# Altium PCB AX301_AX4010.PcbDoc (part 4 of 10)
Units mil, origin at the board's own origin, x right, y up, seen from the top; angles counter-clockwise.
Board outline 5185 x 3614 mil, 4 copper layers (Top Layer, GND, Mid-Layer 1, Bottom Layer); 191 components, 338 nets, 1108 pads, 420 vias.
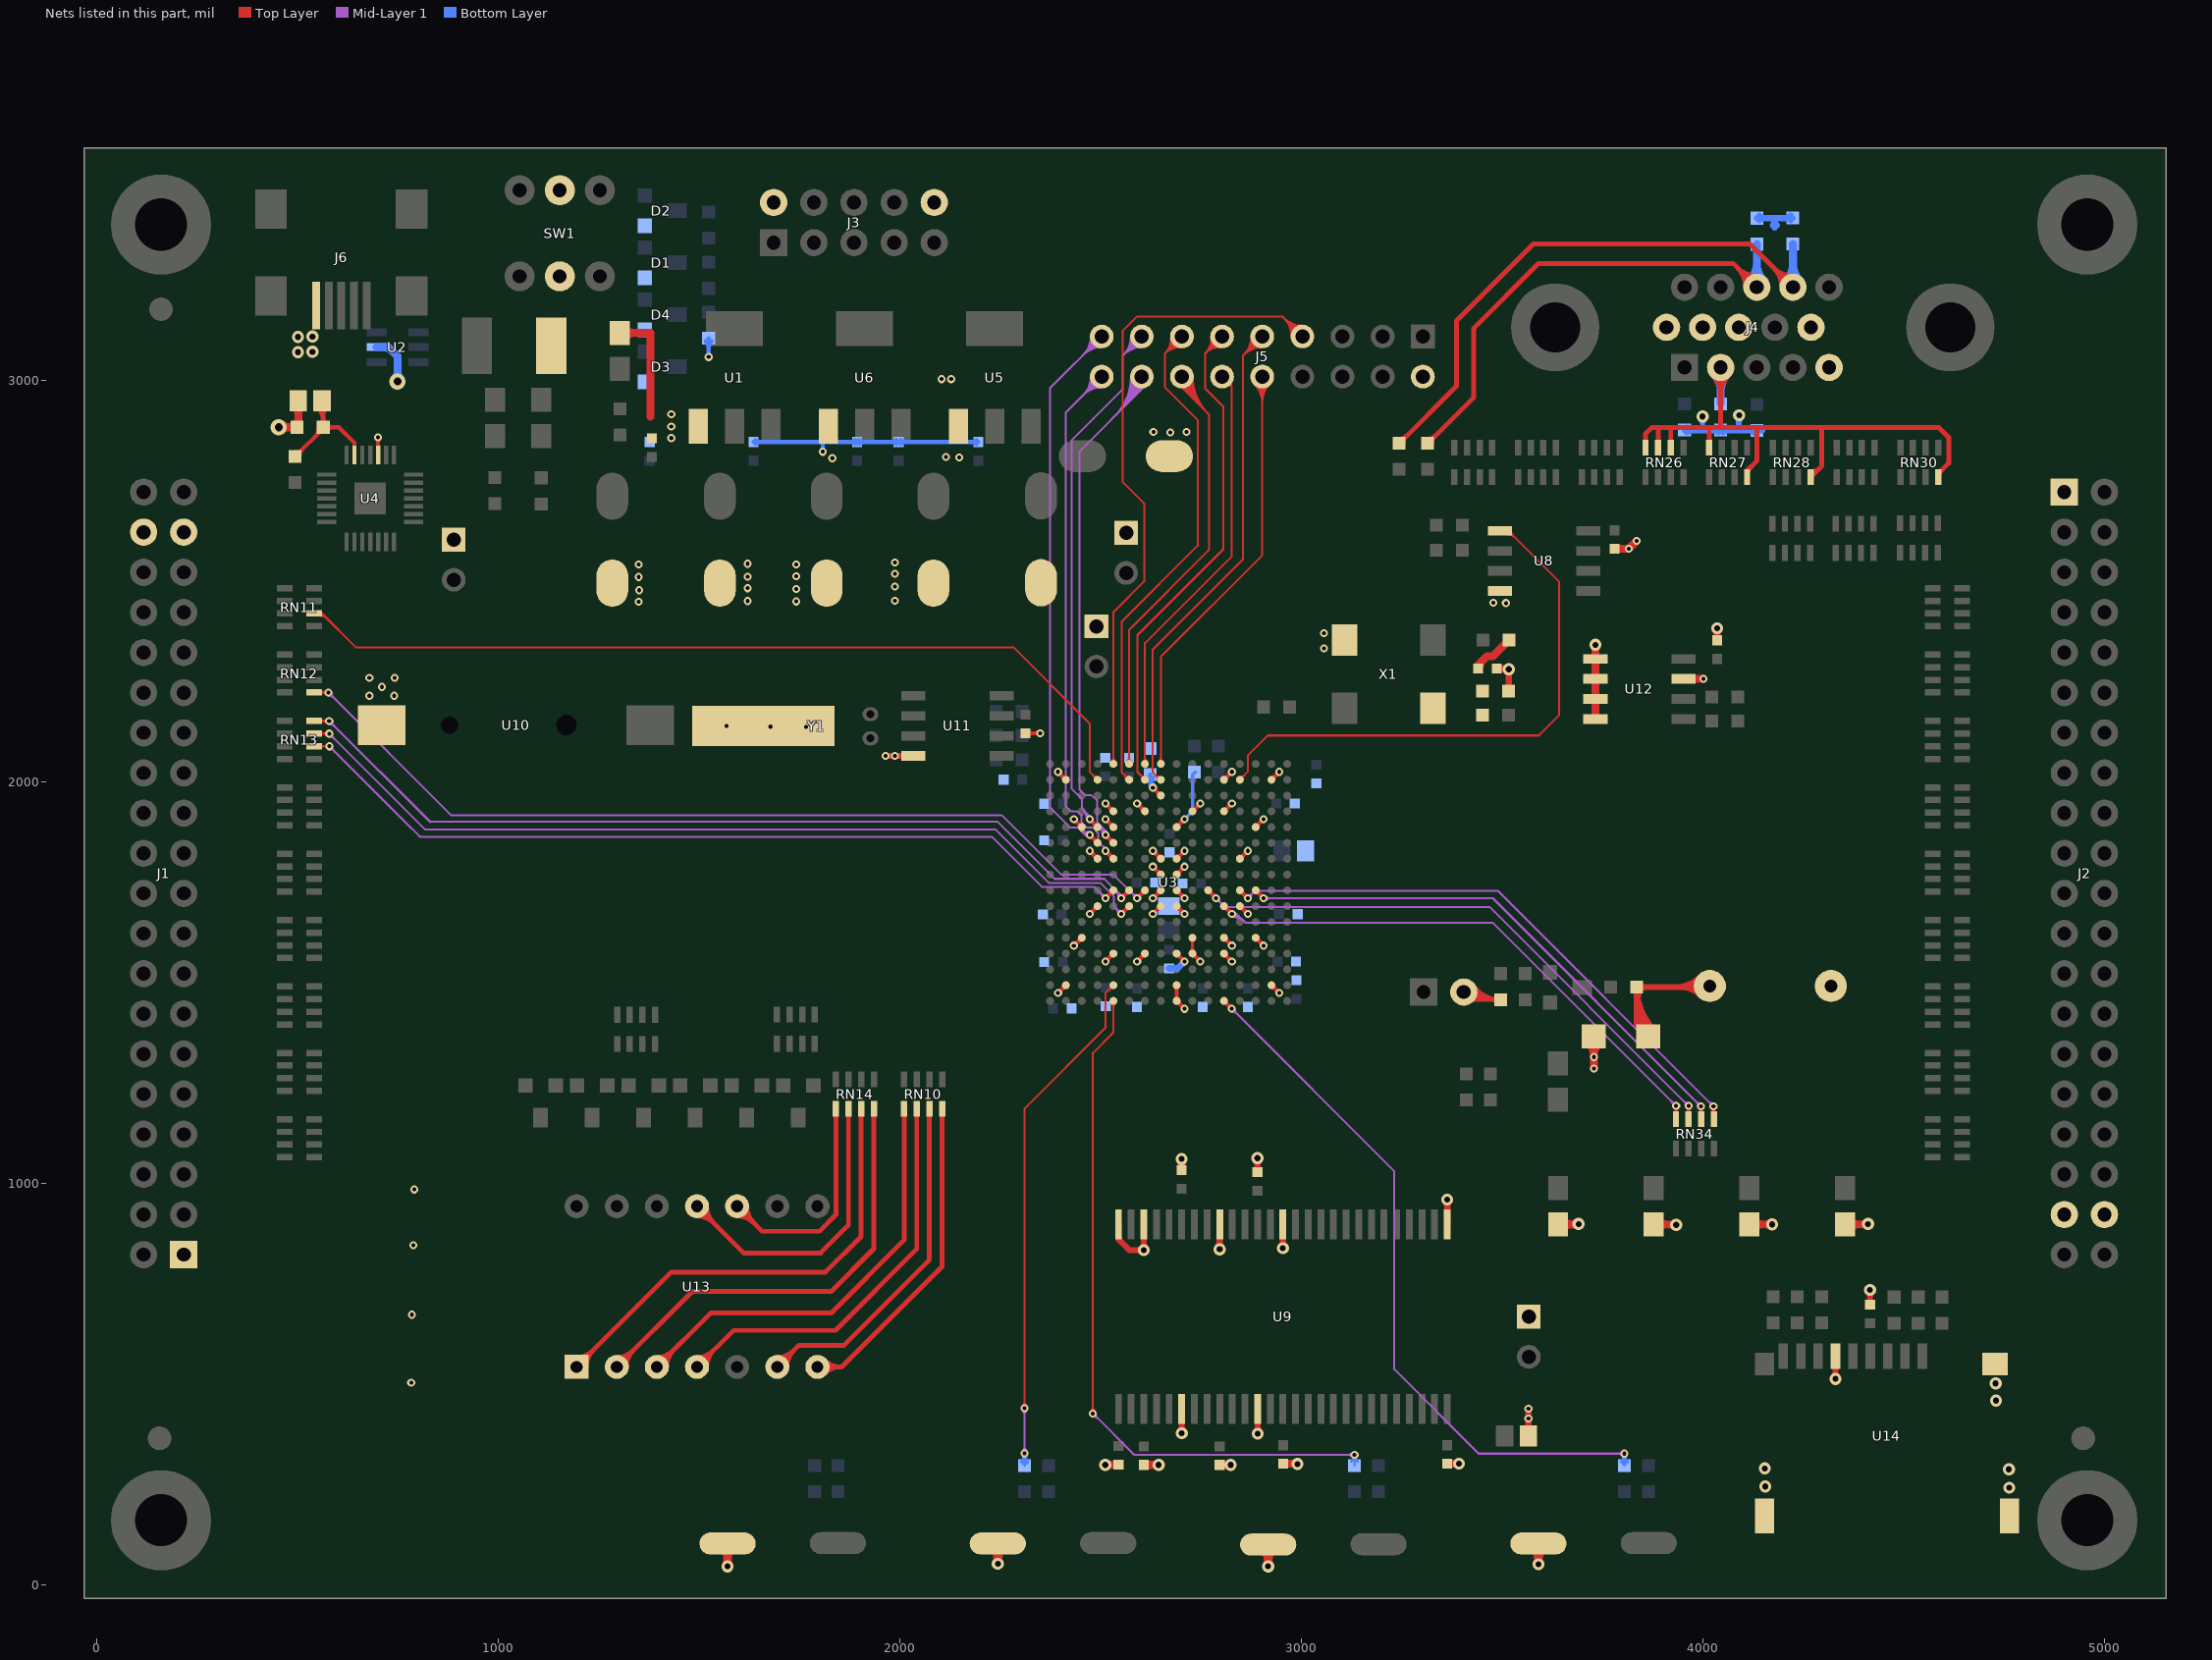
[diagram p6: the nets of this part, all layers, seen from the top]

## Via types
v1: diameter 20, hole 10, Top Layer to Bottom Layer, 377 vias
v2: diameter 30, hole 15, Top Layer to Bottom Layer, 41 vias
v3: diameter 40, hole 20, Top Layer to Bottom Layer, 2 vias

## Nets (pads, with @x,y where several pads share a name; then routed paths per layer and width w, separated by ;. In a path a pad name is that pad's centre, name@x,y a point inside that pad or via, vN(x,y) a via of type N, cw(c..) or ccw(c..) an arc to the next point about the centre after c; other vN are vias at no path point) (continued)
GND: C1.2 C2.2 C3.2 C4.2 C5.2 C6.2 C7.2 C8.2 C9.2 C10.2 C11.2 C12.2 C13.2 C14.2 C15.2 C16.2 C17.2 C18.2 C19.2 C20.2 C21.2 C22.2 C23.2 C24.1 C25.2 C26.2 C27.2 C28.2 C29.2 C30.2 C31.2 C32.2 C33.2 C34.2 C35.2 C36.2 C37.2 C38.2 C39.2 C40.2 C41.2 C42.2 C43.2 C44.2 C45.2 C46.2 C47.2 C48.2 C49.2 C50.2 D1.1 D2.1 D3.1 D4.1 D5.1 EC1.2 EC2.2 EC3.2 EC4.2 EC5.2 EC6.2 J1.1 J1.37 J1.38 J2.1 J2.37 J2.38 J3.2 J3.10 J4.5 J4.6 J4.7 J4.8 J4.10 J5.2 J6.5 K1.2 K2.2 K3.1 K4.2 LED0.2 LED1.2 LED2.2 LED3.2 LED6.2 LS1.2 P1.1 P2.1 P3.1 P4.1 R6.1 R12.2 U1.1 U2.2 U3.B2 U3.B15 U3.C5 U3.C12 U3.D7 U3.D10 U3.E2 U3.E4 U3.E12 U3.E13 U3.G4 U3.G12 U3.G13 U3.H7 U3.H8 U3.H9 U3.H10 U3.H13 U3.H15 U3.H16 U3.J7 U3.J8 U3.J9 U3.J10 U3.K4 U3.K13 U3.M4 U3.M5 U3.M13 U3.N7 U3.N10 U3.P5 U3.P12 U3.R2 U3.R15 U4.3 U5.1 U6.1 U8.4 U9.6 U9.12 U9.28 U9.41 U9.46 U9.52 U9.54 U10.2 U11.4 U12.1 U12.2 U12.3 U12.4 U12.7 U14.6 U14.11 U14.12 U14.13 X1.2 Y1.0 | length 8392.1
  Top Layer w8: U3.G13@2724.92,1575.97 ccw(c2714.95,1585.94) 2729.06,1585.94 ccw(c2743.16,1585.94) U3.G13@2733.19,1575.97 ; U3.G12@2724.92,1607.07 cw(c2714.95,1597.1) 2729.06,1597.1 cw(c2743.16,1597.1) U3.G12@2733.19,1607.07 ; U3.G13@2729.06,1571.83 U3.G12@2729.06,1611.2
  Top Layer w10: v1@697.09,2854.09 cw(c688.56,2845.56) 700.63,2845.56 cw(c712.7,2845.56) v1@704.17,2854.09 ; U4.3@700.63,2814 v1(700.63,2857.63) ; C36.2@2313,2120.76 v1(2349.76,2120.76) ; C36.2@2318.3,2115.45 cw(c2331.11,2102.65) 2331.11,2120.76 cw(c2331.11,2138.86) C36.2@2318.3,2126.06 ; v1@2346.22,2117.22 ccw(c2337.68,2108.68) 2337.68,2120.76 ccw(c2337.68,2132.83) v1@2346.22,2124.29 ; v1(2394.41,1473.41) U3.R15@2414.09,1493.09 ; v1@2394.41,1478.41 ccw(c2394.41,1490.48) 2402.94,1481.94 ccw(c2411.48,1473.41) v1@2399.41,1473.41 ; v1@2394.41,2019.59 cw(c2394.41,2007.52) 2402.94,2016.06 cw(c2411.48,2024.59) v1@2399.41,2024.59 ; v1(2394.41,2024.59) U3.R2@2414.09,2004.91 ; U3.R15@2409.25,1493.09 cw(c2397.56,1493.09) 2405.83,1484.83 cw(c2414.09,1476.56) U3.R15@2414.09,1488.25 ; U3.R2@2409.25,2004.91 ccw(c2397.56,2004.91) 2405.83,2013.17 ccw(c2414.09,2021.44) U3.R2@2414.09,2009.75 ; v1(2433.78,1591.52) U3.P12@2453.46,1611.2 ; v1@2433.78,1596.52 ccw(c2433.78,1608.59) 2442.31,1600.05 ccw(c2450.85,1591.52) v1@2438.78,1591.52 ; v1@2433.78,1901.48 cw(c2433.78,1889.41) 2442.31,1897.95 cw(c2450.85,1906.48) v1@2438.78,1906.48 ; v1(2433.78,1906.48) U3.P5@2453.46,1886.8 ; U3.P12@2448.62,1611.2 cw(c2436.93,1611.2) 2445.2,1602.94 cw(c2453.46,1594.67) U3.P12@2453.46,1606.36 ; U3.P5@2448.62,1886.8 ccw(c2436.93,1886.8) 2445.2,1895.06 ccw(c2453.46,1903.33) U3.P5@2453.46,1891.64 ; v1(2473.15,1670.26) U3.N10@2492.83,1689.94 ; v1@2473.15,1675.26 ccw(c2473.15,1687.33) 2481.68,1678.79 ccw(c2490.22,1670.26) v1@2478.15,1670.26 ; v1@2473.15,1822.74 cw(c2473.15,1810.67) 2481.68,1819.21 cw(c2490.22,1827.74) v1@2478.15,1827.74 ; v1(2473.15,1827.74) U3.N7@2492.83,1808.06 ; U3.N10@2487.99,1689.94 cw(c2476.3,1689.94) 2484.57,1681.68 cw(c2492.83,1673.41) U3.N10@2492.83,1685.1 ; U3.N7@2487.99,1808.06 ccw(c2476.3,1808.06) 2484.57,1816.32 ccw(c2492.83,1824.59) U3.N7@2492.83,1812.9 ; v1(2512.52,1552.15) U3.M13@2532.2,1571.83 ; v1@2512.52,1557.15 ccw(c2512.52,1569.22) 2521.05,1560.68 ccw(c2529.59,1552.15) v1@2517.52,1552.15 ; v1@2512.52,1901.48 cw(c2512.52,1889.41) 2521.05,1897.95 cw(c2529.59,1906.48) v1@2517.52,1906.48 ; v1(2512.52,1906.48) U3.M5@2532.2,1886.8 ; v1@2512.52,1940.85 cw(c2512.52,1928.78) 2521.05,1937.32 cw(c2529.59,1945.85) v1@2517.52,1945.85 ; v1(2512.52,1945.85) U3.M4@2532.2,1926.17 ; U3.M13@2527.36,1571.83 cw(c2515.67,1571.83) 2523.94,1563.57 cw(c2532.2,1555.3) U3.M13@2532.2,1566.99 ; U3.M5@2527.36,1886.8 ccw(c2515.67,1886.8) 2523.94,1895.06 ccw(c2532.2,1903.33) U3.M5@2532.2,1891.64 ; U3.M4@2527.36,1926.17 ccw(c2515.67,1926.17) 2523.94,1934.43 ccw(c2532.2,1942.7) U3.M4@2532.2,1931.01 ; v1(2591.26,1552.15) U3.K13@2610.94,1571.83 ; v1@2591.26,1557.15 ccw(c2591.26,1569.22) 2599.79,1560.68 ccw(c2608.33,1552.15) v1@2596.26,1552.15 ; v1@2591.26,1940.85 cw(c2591.26,1928.78) 2599.79,1937.32 cw(c2608.33,1945.85) v1@2596.26,1945.85 ; v1(2591.26,1945.85) U3.K4@2610.94,1926.17 ; U3.K13@2606.1,1571.83 cw(c2594.41,1571.83) 2602.68,1563.57 cw(c2610.94,1555.3) U3.K13@2610.94,1566.99 ; U3.K4@2606.1,1926.17 ccw(c2594.41,1926.17) 2602.68,1934.43 ccw(c2610.94,1942.7) U3.K4@2610.94,1931.01 ; v1(2630.63,1670.26) U3.J10@2650.32,1689.94 ; v1@2630.63,1675.26 ccw(c2630.63,1687.33) 2639.16,1678.79 ccw(c2647.7,1670.26) v1@2635.63,1670.26 ; v1(2630.63,1709.63) U3.J9@2650.32,1729.32 ; v1@2630.63,1714.63 ccw(c2630.63,1726.7) 2639.16,1718.16 ccw(c2647.7,1709.63) v1@2635.63,1709.63 ; v1@2630.63,1783.37 cw(c2630.63,1771.3) 2639.16,1779.84 cw(c2647.7,1788.37) v1@2635.63,1788.37 ; v1(2630.63,1788.37) U3.J8@2650.32,1768.68 ; v1@2630.63,1822.74 cw(c2630.63,1810.67) 2639.16,1819.21 cw(c2647.7,1827.74) v1@2635.63,1827.74 ; v1(2630.63,1827.74) U3.J7@2650.32,1808.06 ; U3.J10@2645.47,1689.94 cw(c2633.78,1689.94) 2642.05,1681.68 cw(c2650.32,1673.41) U3.J10@2650.32,1685.1 ; U3.J9@2645.47,1729.32 cw(c2633.78,1729.32) 2642.05,1721.05 cw(c2650.32,1712.78) U3.J9@2650.32,1724.47 ; U3.J8@2645.47,1768.68 ccw(c2633.78,1768.68) 2642.05,1776.95 ccw(c2650.32,1785.22) U3.J8@2650.32,1773.53 ; U3.J7@2645.47,1808.06 ccw(c2633.78,1808.06) 2642.05,1816.32 ccw(c2650.32,1824.59) U3.J7@2650.32,1812.9 ; U3.H16@2686.26,1457.15 ccw(c2677.99,1465.42) 2689.68,1465.42 ccw(c2701.38,1465.42) U3.H16@2693.11,1457.15 ; U3.H15@2686.26,1489.67 cw(c2677.99,1481.4) 2689.68,1481.4 cw(c2701.38,1481.4) U3.H15@2693.11,1489.67 ; U3.H16@2689.68,1448.88 cw(c2689.68,1437.19) 2697.95,1445.46 cw(c2706.22,1453.72) U3.H16@2694.53,1453.72 ; U3.H15@2689.68,1493.09 U3.H16@2689.68,1453.72 v1(2709.37,1434.04) ; U3.H13@2689.68,1566.99 cw(c2689.68,1555.3) 2697.95,1563.57 cw(c2706.22,1571.83) U3.H13@2694.53,1571.83 ; U3.H13@2689.68,1571.83 v1(2709.37,1552.15) ; U3.H10@2689.68,1685.1 cw(c2689.68,1673.41) 2697.95,1681.68 cw(c2706.22,1689.94) U3.H10@2694.53,1689.94 ; U3.H10@2689.68,1689.94 v1(2709.37,1670.26) ; U3.H9@2689.68,1724.47 cw(c2689.68,1712.78) 2697.95,1721.05 cw(c2706.22,1729.32) U3.H9@2694.53,1729.32 ; U3.H9@2689.68,1729.32 v1(2709.37,1709.63) ; U3.H8@2689.68,1768.68 v1(2709.37,1788.37) ; U3.H8@2689.68,1773.53 ccw(c2689.68,1785.22) 2697.95,1776.95 ccw(c2706.22,1768.68) U3.H8@2694.53,1768.68 ; U3.H7@2689.68,1808.06 v1(2709.37,1827.74) ; U3.H7@2689.68,1812.9 ccw(c2689.68,1824.59) 2697.95,1816.32 ccw(c2706.22,1808.06) U3.H7@2694.53,1808.06 ; v1@2704.37,1434.04 ccw(c2692.3,1434.04) 2700.84,1442.57 ccw(c2709.37,1451.11) v1@2709.37,1439.04 ; v1@2704.37,1552.15 ccw(c2692.3,1552.15) 2700.84,1560.68 ccw(c2709.37,1569.22) v1@2709.37,1557.15 ; v1@2704.37,1670.26 ccw(c2692.3,1670.26) 2700.84,1678.79 ccw(c2709.37,1687.33) v1@2709.37,1675.26 ; v1@2704.37,1709.63 ccw(c2692.3,1709.63) 2700.84,1718.16 ccw(c2709.37,1726.7) v1@2709.37,1714.63 ; v1@2704.37,1788.37 cw(c2692.3,1788.37) 2700.84,1779.84 cw(c2709.37,1771.3) v1@2709.37,1783.37 ; v1@2704.37,1827.74 cw(c2692.3,1827.74) 2700.84,1819.21 cw(c2709.37,1810.67) v1@2709.37,1822.74 ; U3.G13@2729.06,1566.99 cw(c2729.06,1555.3) 2737.32,1563.57 cw(c2745.59,1571.83) U3.G13@2733.9,1571.83 ; U3.G13@2729.06,1571.83 v1(2748.74,1552.15) ; U3.G4@2729.06,1926.17 v1(2748.74,1945.85) ; U3.G4@2729.06,1931.01 ccw(c2729.06,1942.7) 2737.32,1934.43 ccw(c2745.59,1926.17) U3.G4@2733.9,1926.17 ; v1@2743.74,1552.15 ccw(c2731.67,1552.15) 2740.21,1560.68 ccw(c2748.74,1569.22) v1@2748.74,1557.15 ; v1@2743.74,1945.85 cw(c2731.67,1945.85) 2740.21,1937.32 cw(c2748.74,1928.78) v1@2748.74,1940.85 ; U3.E13@2807.8,1566.99 cw(c2807.8,1555.3) 2816.06,1563.57 cw(c2824.33,1571.83) U3.E13@2812.64,1571.83 ; U3.E13@2807.8,1571.83 v1(2827.48,1552.15) ; U3.E12@2807.8,1606.36 cw(c2807.8,1594.67) 2816.06,1602.94 cw(c2824.33,1611.2) U3.E12@2812.64,1611.2 ; U3.E12@2807.8,1611.2 v1(2827.48,1591.52) ; U3.E4@2807.8,1926.17 v1(2827.48,1945.85) ; U3.E4@2807.8,1931.01 ccw(c2807.8,1942.7) 2816.06,1934.43 ccw(c2824.33,1926.17) U3.E4@2812.64,1926.17 ; U3.E2@2807.8,2004.91 v1(2827.48,2024.59) ; U3.E2@2807.8,2009.75 ccw(c2807.8,2021.44) 2816.06,2013.17 ccw(c2824.33,2004.91) U3.E2@2812.64,2004.91 ; v1@2822.48,1552.15 ccw(c2810.41,1552.15) 2818.95,1560.68 ccw(c2827.48,1569.22) v1@2827.48,1557.15 ; v1@2822.48,1591.52 ccw(c2810.41,1591.52) 2818.95,1600.05 ccw(c2827.48,1608.59) v1@2827.48,1596.52 ; v1@2822.48,1945.85 cw(c2810.41,1945.85) 2818.95,1937.32 cw(c2827.48,1928.78) v1@2827.48,1940.85 ; v1@2822.48,2024.59 cw(c2810.41,2024.59) 2818.95,2016.06 cw(c2827.48,2007.52) v1@2827.48,2019.59 ; U3.D10@2847.17,1685.1 cw(c2847.17,1673.41) 2855.43,1681.68 cw(c2863.7,1689.94) U3.D10@2852.01,1689.94 ; U3.D10@2847.17,1689.94 v1(2866.85,1670.26) ; U3.D7@2847.17,1808.06 v1(2866.85,1827.74) ; U3.D7@2847.17,1812.9 ccw(c2847.17,1824.59) 2855.43,1816.32 ccw(c2863.7,1808.06) U3.D7@2852.01,1808.06 ; v1@2861.85,1670.26 ccw(c2849.78,1670.26) 2858.32,1678.79 ccw(c2866.85,1687.33) v1@2866.85,1675.26 ; v1@2861.85,1827.74 cw(c2849.78,1827.74) 2858.32,1819.21 cw(c2866.85,1810.67) v1@2866.85,1822.74 ; U3.C12@2886.54,1606.36 cw(c2886.54,1594.67) 2894.8,1602.94 cw(c2903.07,1611.2) U3.C12@2891.38,1611.2 ; U3.C12@2886.54,1611.2 v1(2906.22,1591.52) ; U3.C5@2886.54,1886.8 v1(2906.22,1906.48) ; U3.C5@2886.54,1891.64 ccw(c2886.54,1903.33) 2894.8,1895.06 ccw(c2903.07,1886.8) U3.C5@2891.38,1886.8 ; v1@2901.22,1591.52 ccw(c2889.15,1591.52) 2897.69,1600.05 ccw(c2906.22,1608.59) v1@2906.22,1596.52 ; v1@2901.22,1906.48 cw(c2889.15,1906.48) 2897.69,1897.95 cw(c2906.22,1889.41) v1@2906.22,1901.48 ; U3.B15@2925.91,1488.25 cw(c2925.91,1476.56) 2934.17,1484.83 cw(c2942.44,1493.09) U3.B15@2930.75,1493.09 ; U3.B15@2925.91,1493.09 v1(2945.59,1473.41) ; U3.B2@2925.91,2004.91 v1(2945.59,2024.59) ; U3.B2@2925.91,2009.75 ccw(c2925.91,2021.44) 2934.17,2013.17 ccw(c2942.44,2004.91) U3.B2@2930.75,2004.91 ; v1@2940.59,1473.41 ccw(c2928.52,1473.41) 2937.06,1481.94 ccw(c2945.59,1490.48) v1@2945.59,1478.41 ; v1@2940.59,2024.59 cw(c2928.52,2024.59) 2937.06,2016.06 cw(c2945.59,2007.52) v1@2945.59,2019.59 ; LED1.2@3878.33,897 v2@3933,897 ; LED1.2@3892.48,882.86 cw(c3926.62,848.72) 3926.62,897 cw(c3926.62,945.28) LED1.2@3892.48,911.14 ; 3907.29,891.82 cw(c3913.63,868.16) v2@3928.1,887.93 ; 3907.44,897 cw(c3907.44,869.44) v2@3926.93,888.93 ; 3908.23,901.93 ccw(c3915.32,928.36) v2@3929,904.66 ; 3912.27,897 ccw(c3912.27,917.73) v2@3926.93,903.07 ; 3912.64,900.75 cw(c3907.23,880.54) v2@3925.34,891 ; 3916.64,894.33 ccw(c3912.94,908.16) v2@3925.34,901 ; LED2.2@4116.67,897 v2(4173,897) ; LED2.2@4130.81,882.86 cw(c4164.95,848.72) 4164.95,897 cw(c4164.95,945.28) LED2.2@4130.81,911.14 ; 4144.3,891.47 cw(c4152.38,861.31) v2@4168,888.34 ; 4144.3,902.53 ccw(c4152.38,932.69) v2@4168,905.66 ; 4154,894.07 ccw(c4149.59,910.51) v2@4164.34,902 ; 4154,899.93 cw(c4149.59,883.49) v2@4164.34,892 ; v2@4165.93,889.93 ccw(c4148.86,872.86) 4148.86,897 ccw(c4148.86,921.14) v2@4165.93,904.07 ; LED3.2@4355,897 v2@4411,897 ; LED3.2@4369.14,882.86 cw(c4403.28,848.72) 4403.28,897 cw(c4403.28,945.28) LED3.2@4369.14,911.14 ; 4384.53,902.02 ccw(c4391.1,926.52) v2@4406.09,906.07 ; 4385.34,892.19 cw(c4392.73,864.62) v2@4407,889.34 ; 4385.44,897 ccw(c4385.44,924.56) v2@4404.93,905.07 ; 4390.27,897 cw(c4390.27,876.27) v2@4404.93,890.93 ; 4391.35,893.8 ccw(c4386.25,912.87) v2@4403.34,903 ; 4395.36,899.12 cw(c4391.96,886.43) v2@4403.34,893
  Top Layer w15: v1(1965,2064) U11.4@2034,2064 ; U9.54@2545,897 2545,860 2572,833 v2(2608,833) U9.52@2607.99,897 ; U9.54@2546,868 ccw(c2567.73,868) 2552.36,852.64 ; v2@2602.7,827.7 ccw(c2589.89,814.89) 2589.89,833 ccw(c2589.89,851.11) 2602.7,838.3 ccw(c2589.91,851.09) 2607.99,851.09 ; 2607.99,851.13 ccw(c2626.13,851.13) v2@2613.3,838.3 ; v2@2697.18,381.82 ccw(c2684.37,394.63) 2702.48,394.63 ccw(c2720.59,394.63) v2@2707.78,381.82 ; v2(2702.48,376.52) U9.6@2702.48,437 ; v2@2886.15,380.85 ccw(c2873.35,393.65) 2891.46,393.65 ccw(c2909.56,393.65) v2@2896.76,380.85 ; v2(2891.46,375.54) U9.12@2891.46,437 ; v2@2949.15,843.3 ccw(c2936.34,856.11) 2954.45,856.11 ccw(c2972.56,856.11) v2@2959.75,843.3 ; v2(2954.45,838) U9.41@2954.45,907.55 ; C46.2@3510.99,2232.01 ccw(c3496.48,2246.52) 3517,2246.52 ccw(c3537.52,2246.52) C46.2@3523.01,2232.01 ; v2@3511.7,2274.7 cw(c3498.89,2261.89) 3517,2261.89 cw(c3535.11,2261.89) v2@3522.3,2274.7 ; C46.2@3517,2226 v2(3517,2280) ; C50.2@3566.06,370 v1(3566.06,413.06) v1(3566.06,438.06) ; LED0.2@3640,897 v2@3690,897 ; LED0.2@3652.37,884.63 cw(c3682.25,854.75) 3682.25,897 cw(c3682.25,939.25) LED0.2@3652.37,909.37 ; 3666.53,901.21 ccw(c3673.2,926.09) v2@3686.99,904.34 ; 3670.14,893.76 cw(c3675.98,871.98) v2@3687.25,891.5 ; 3670.48,897 ccw(c3670.48,918.52) v2@3685.7,903.3 ; 3675.31,897 cw(c3675.31,882.31) v2@3685.7,892.7 ; 3676.2,895.38 ccw(c3672.67,908.59) v2@3684.5,901.75 ; v2@4325.74,517.35 ccw(c4312.94,530.15) 4331.05,530.15 ccw(c4349.15,530.15) v2@4336.35,517.35 ; v2(4331.05,512.05) U14.6@4331.05,568.82 ; v2@4411.7,728.7 cw(c4398.89,715.89) 4417,715.89 cw(c4435.11,715.89) v2@4422.3,728.7 ; C43.2@4417,697.24 v2(4417,734)
  Top Layer w16: K1.2@1557.17,88.17 cw(c1523.78,54.78) 1571,54.78 cw(c1618.22,54.78) K1.2@1584.83,88.17 ; v2@1564.94,48.5 ccw(c1542.82,61.27) 1567.49,67.88 ; v2@1566.05,49.95 ccw(c1554.1,61.9) 1571,61.9 ccw(c1587.9,61.9) v2@1575.95,49.95 ; v2(1571,45) K1.2@1571,102 ; 1574.51,67.88 ccw(c1599.18,61.27) v2@1577.06,48.5 ; K2.2@2230.5,88.17 cw(c2197.11,54.78) 2244.33,54.78 cw(c2291.55,54.78) K2.2@2258.16,88.17 ; v2@2238.27,55.17 ccw(c2221.25,64.99) 2240.23,70.08 ; v2@2239.38,56.62 ccw(c2227.43,68.57) 2244.33,68.57 ccw(c2261.23,68.57) v2@2249.28,56.62 ; v2(2244.33,51.67) K2.2@2244.33,102 ; 2248.43,70.08 ccw(c2267.41,64.99) v2@2250.4,55.17 ; v2@2792.05,839.95 ccw(c2780.18,851.82) 2796.97,851.82 ; v2(2797,835) U9.46@2796.97,897 ; 2796.97,851.98 ccw(c2813.98,851.98) v2@2801.95,839.95 ; v2@2886.05,1057.05 cw(c2874.1,1045.1) 2891,1045.1 cw(c2907.9,1045.1) v2@2895.95,1057.05 ; C35.2@2891,1027.24 v2(2891,1062) ; K3.1@2903.84,85.37 cw(c2870.45,51.99) 2917.67,51.99 cw(c2964.89,51.99) K3.1@2931.5,85.37 ; v2@2911.6,48.5 ccw(c2891.62,60.04) 2913.91,66.01 ; v2@2912.72,49.95 ccw(c2900.77,61.9) 2917.67,61.9 ccw(c2934.57,61.9) v2@2922.62,49.95 ; v2(2917.67,45) K3.1@2917.67,99.2 ; 2921.42,66.01 ccw(c2943.71,60.04) v2@2923.73,48.5 ; v2@3358.95,954.15 cw(c3347,942.2) 3363.9,942.2 cw(c3380.8,942.2) v2@3368.85,954.15 ; U9.28@3363.9,897 v2(3363.9,959.1) ; C3.2@3487.24,2282 3515,2282 v2(3517,2280) ; C3.2@3495.27,2282 cw(c3495.27,2258.27) v2@3512.05,2275.05 ; K4.2@3577.17,88.17 cw(c3543.78,54.78) 3591,54.78 cw(c3638.22,54.78) K4.2@3604.83,88.17 ; v2@3584.94,53.5 ccw(c3566.64,64.06) 3587.05,69.53 ; v2@3586.05,54.95 ccw(c3574.1,66.9) 3591,66.9 ccw(c3607.9,66.9) v2@3595.95,54.95 ; v2(3591,50) K4.2@3591,102 ; 3594.95,69.53 ccw(c3615.36,64.06) v2@3597.06,53.5 ; v2@4031.05,2377.05 cw(c4019.1,2365.1) 4036,2365.1 cw(c4052.9,2365.1) v2@4040.95,2377.05 ; C37.2@4036,2352.24 v2(4036,2382)
  Top Layer w19.68: v3(453,2883) C1.2@499,2883 501.94,2883 C2.2@501.94,2949 ; v3@460.18,2875.82 cw(c477.52,2858.48) 477.52,2883 cw(c477.52,2907.52) v3@460.18,2890.18 ; C2.2@493.59,2935.53 cw(c473.43,2915.37) 501.94,2915.37 cw(c530.46,2915.37) C2.2@510.3,2935.53 ; C1.2@494.65,2887.35 ccw(c477.02,2904.98) 501.94,2904.98
  Top Layer w20: LED6.2@1303,3118 1379,3118 1379,2909 ; LED6.2@1313.61,3107.39 cw(c1339.21,3081.79) 1339.21,3118 cw(c1339.21,3154.21) LED6.2@1313.61,3128.61 ; v2@2512,298.76 C30.2@2545,298.76 ; C29.2@2607.99,297.76 2607.99,298 v2(2645,298) ; C34.2@2702,1032.24 v2(2702,1060) ; C31.2@2797,297.76 v2(2824.24,297.76) ; C32.2@2955,300.76 v2@2990.76,300.76 ; C33.2@3364,300.76 v2(3392.76,300.76) ; D5.1@3714.86,1350.86 cw(c3680.72,1316.72) 3729,1316.72 cw(c3777.28,1316.72) D5.1@3743.14,1350.86 ; v1(3729,1285) v1(3729,1314) D5.1@3729,1365 ; U12.4@3733,2156 U12.3@3733,2206 U12.2@3733,2256 v2(3733,2341) ; C24.1@3781,2580 v1(3816,2580) v1(3836,2600) ; U12.7@3953,2256 v1(4002,2256)
  Bottom Layer w10: R6.1@1516.22,3097.22 cw(c1497.44,3078.44) 1524,3078.44 cw(c1550.56,3078.44) R6.1@1531.78,3097.22 ; v1@1520.46,3061.54 ccw(c1511.93,3070.07) 1524,3070.07 ccw(c1536.07,3070.07) v1@1527.54,3061.54 ; v1(1524,3058) R6.1@1524,3105 ; C45.2@1636,2846.24 1808,2846.24 ; C45.2@1641.3,2840.94 cw(c1654.11,2828.14) 1654.11,2846.24 cw(c1654.11,2864.35) C45.2@1641.3,2851.55 ; v1@1804.46,2825.54 ccw(c1795.93,2834.07) 1808,2834.07 ccw(c1820.07,2834.07) v1@1811.54,2825.54 ; v1(1808,2822) 1808,2846.24 ; C4.2@1888.7,2840.94 ccw(c1875.89,2828.14) 1875.89,2846.24 ccw(c1875.89,2864.35) C4.2@1888.7,2851.55 ; C4.2@1899.3,2840.94 cw(c1912.11,2828.14) 1912.11,2846.24 cw(c1912.11,2864.35) C4.2@1899.3,2851.55 ; C21.2@1991.7,2840.94 ccw(c1978.89,2828.14) 1978.89,2846.24 ccw(c1978.89,2864.35) C21.2@1991.7,2851.55 ; C21.2@2002.3,2840.94 cw(c2015.11,2828.14) 2015.11,2846.24 cw(c2015.11,2864.35) C21.2@2002.3,2851.55 ; C48.2@2190.7,2840.94 ccw(c2177.89,2828.14) 2177.89,2846.24 ccw(c2177.89,2864.35) C48.2@2190.7,2851.55 ; C48.2@2196,2846.24 C21.2@1997,2846.24 C4.2@1894,2846.24 1808,2846.24 ; v2@3992.93,2902.93 cw(c3975.86,2885.86) 4000,2885.86 cw(c4024.14,2885.86) v2@4007.07,2902.93 ; 4000,2875 v2(4000,2910)
  Bottom Layer w15: C38.2@3956,2875 4000,2875 4090,2875 ; C38.2@3961.01,2869.99 cw(c3973.11,2857.89) 3973.11,2875 ; C38.2@3961.01,2882.01 ccw(c3977.94,2898.93) 3977.94,2875 ; 4022.06,2875 ccw(c4022.06,2898.93) C39.2@4038.99,2882.01 ; 4026.89,2875 cw(c4026.89,2857.89) C39.2@4038.99,2869.99 ; C39.2@4051.01,2869.99 cw(c4063.11,2857.89) 4063.11,2875 ; C39.2@4051.01,2882.01 ccw(c4067.94,2898.93) 4067.94,2875 ; v2@4085.7,2907.7 cw(c4075.31,2897.31) 4090,2897.31 ; 4090,2892.48 cw(c4111.52,2892.48) v2@4096.3,2907.7 ; v2@4090,2912 4090,2875 ; C40.2@4128.99,2868.99 ccw(c4114.48,2854.48) 4114.48,2875 ccw(c4114.48,2895.52) C40.2@4128.99,2881.01 ; C41.2@4135,3404 4179.5,3404 ; C41.2@4141.01,3397.99 cw(c4155.52,3383.48) 4155.52,3404 cw(c4155.52,3424.52) C41.2@4141.01,3410.01 ; C40.2@4149,2875 C40.2@4135,2875 4090,2875 ; 4174.2,3385.8 ccw(c4161.39,3398.61) 4179.5,3398.61 ccw(c4197.61,3398.61) 4184.8,3385.8 ; 4179.5,3380.5 4179.5,3404 ; 4202.06,3404 ccw(c4202.06,3427.93) C42.2@4218.99,3411.01 ; 4206.89,3404 cw(c4206.89,3386.89) C42.2@4218.99,3398.99 ; C42.2@4224,3404 4179.5,3404
  Bottom Layer w16: C8.2@2671,1534.76 2691.98,1534.76 v1(2709.37,1552.15)
  Bottom Layer w19.68: U2.2@697,3082.4 726.6,3082.4 749,3060 v3(749,2997) ; U2.2@712.16,3082.4 cw(c712.16,3047.54) 736.81,3072.19 ; v3@741.82,3004.18 ccw(c724.48,3021.52) 749,3021.52 ccw(c773.52,3021.52) v3@756.18,3004.18
  other v1: 783,503 785,672 788,845 791,984 1988,2064 1767,2136 1678,2137 1569,2139 679,2214 741,2214 710,2236 679,2259 742,2259 3057,2332 3057,2370 3510,2445 3479,2446 1350,2448 1742,2449 1621,2450 1988,2451 1351,2477 1742,2480 1621,2482 1988,2486 1350,2510 1621,2511 1742,2512 1988,2518 1350,2541 1742,2541 1621,2543 1988,2546 1832,2806 2148,2808 2115,2809 1431,2856 2674,2870 2632,2871 2714,2871 1431,2885 1431,2915 2104,3003 2128,3003
  other v2: 4764,241 4156,244 4763,287 4155,289 2512,298 2991,300 4731,458 4730,501 3934,896 3691,898 4412,898 4091,2913 501,3070 537,3071 501,3108 537,3109
GREEN: C39.1 J4.2 RN26.2 RN26.3 RN26.4 RN27.4 RN27.8 RN28.8 RN30.8 | length 1876.1
  Top Layer w12: RN26.4@3857.65,2832 3857.65,2866.65 3873,2882 4135,2882 ; RN26.3@3889.15,2832 3889.15,2880.15 ; RN26.2@3920.65,2832 3920.65,2881.65 ; RN27.4@4016.37,2832 4016.37,2880.37 ; J4.2@4025.2,3012.2 cw(c3977.4,2964.4) 4045,2964.4 cw(c4112.6,2964.4) J4.2@4064.8,3012.2 ; J4.2@4033.69,3020.69 cw(c4006.37,2993.37) 4045,2993.37 cw(c4083.63,2993.37) J4.2@4056.31,3020.69 ; 4045,2883 J4.2@4045,3032 ; RN27.8@4110.86,2758.85 4110.86,2774.86 4135,2799 4135,2882 ; RN27.8@4112.73,2770.66 cw(c4127.38,2770.66) 4117.02,2781.02 ; RN28.8@4269.57,2758.85 4297,2786.28 4297,2882 ; RN28.8@4269.57,2760.54 ccw(c4269.57,2764.6) RN28.8@4272.45,2761.73 ; RN28.8@4269.57,2772.54 ccw(c4269.57,2805.57) 4292.93,2782.21 ; RN30.8@4587,2758.85 4587,2767.5 4613,2793.5 4613,2858 4589,2882 4297,2882 ; RN30.8@4587,2772.54 ccw(c4587,2784.69) 4595.59,2776.1 ; 4135,2882 4297,2882
  Bottom Layer w20: J4.2@4028.03,3015.03 cw(c3987.06,2974.06) 4045,2974.06 cw(c4102.94,2974.06) J4.2@4061.97,3015.03 ; C39.1@4045,2943 J4.2@4045,3032
J1: J5.10 U3.J1 | length 1348
  Top Layer w5: U3.J1@2645.12,2049.47 ccw(c2632.59,2062) 2650.32,2062 ccw(c2668.04,2062) U3.J1@2655.51,2049.47 ; U3.J1@2650.32,2044.28 2650.32,2311.32 2903,2564 J5.10@2903,3009.17 ; J5.10@2883.89,2990.06 cw(c2837.75,2943.92) 2903,2943.92 cw(c2968.25,2943.92) J5.10@2922.11,2990.06 ; J5.10@2887.42,2993.6 cw(c2849.82,2955.99) 2903,2955.99 cw(c2956.18,2955.99) J5.10@2918.58,2993.6 ; J5.10@2890.96,2997.13 cw(c2861.89,2968.07) 2903,2968.07 cw(c2944.11,2968.07) J5.10@2915.04,2997.13
J2: J5.9 U3.J2 | length 1504
  Top Layer w5: U3.J2@2642.99,2004.36 ccw(c2626.23,2003.1) 2636.99,2016.01 ; U3.J2@2649.54,2012.21 cw(c2647.75,2028.92) 2636.99,2016.01 ; U3.J2@2650.32,2004.91 2636.99,2016.01 ; J5.9@2875.97,3109.17 cw(c2810.72,3109.17) 2856.86,3063.03 cw(c2903,3016.9) J5.9@2903,3082.15 ; J5.9@2880.97,3109.17 cw(c2827.79,3109.17) 2865.4,3071.57 cw(c2903,3033.97) J5.9@2903,3087.15 ; J5.9@2885.97,3109.17 cw(c2844.86,3109.17) 2873.93,3080.11 cw(c2903,3051.04) J5.9@2903,3092.15 ; J5.9@2903,3109.17 2855,3061.17 2855,2554 2630,2329 2630,2023 2636.99,2016.01
K1: J5.12 U3.K1 | length 1113.1
  Top Layer w5: U3.K1@2605.75,2049.47 ccw(c2593.22,2062) 2610.94,2062 ccw(c2628.67,2062) U3.K1@2616.14,2049.47 ; U3.K1@2610.94,2044.28 2610.94,2344.94 2827,2561 2827,2985.17 ; J5.12@2803,3009.17 2827,2985.17 ; J5.12@2817.35,2986.27 cw(c2821.49,2979.66) 2827,2985.17 ; J5.12@2825.9,2994.83 ccw(c2832.51,2990.69) 2827,2985.17
K2: J5.11 U3.K2 | length 1480.8
  Top Layer w5: U3.K2@2603.6,2004.91 ccw(c2585.88,2004.91) 2598.41,2017.44 ccw(c2610.94,2029.97) U3.K2@2610.94,2012.25 ; U3.K2@2610.94,2004.91 2592,2023.85 2592,2365 2806,2579 2806,2934 2761,2979 2761,3067.17 J5.11@2803,3109.17 ; J5.11@2776.04,3107.32 cw(c2724.41,3103.77) 2761,3067.18 cw(c2797.59,3030.58) J5.11@2801.14,3082.21 ; J5.11@2781.02,3107.66 cw(c2738.95,3104.77) 2768.77,3074.94 cw(c2798.59,3045.12) J5.11@2801.49,3087.2 ; J5.11@2786.01,3108 cw(c2753.49,3105.77) 2776.54,3082.71 cw(c2799.59,3059.66) J5.11@2801.83,3092.19
K9: RN12.5 U3.K9 | length 2433.3
  Top Layer w5: RN12.5@541.15,2222.14 v1(577.14,2222.14) ; RN12.5@556.76,2218.34 cw(c565.93,2209.16) 565.93,2222.14 cw(c565.93,2235.11) RN12.5@556.76,2225.94 ; v1@571.83,2216.83 ccw(c559.03,2204.03) 559.03,2222.14 ccw(c559.03,2240.24) v1@571.83,2227.44
  Top Layer w10: v1(2591.26,1709.63) U3.K9@2610.94,1729.32 ; v1@2591.26,1714.63 ccw(c2591.26,1726.7) 2599.79,1718.16 ccw(c2608.33,1709.63) v1@2596.26,1709.63 ; U3.K9@2606.1,1729.32 cw(c2594.41,1729.32) 2602.68,1721.05 cw(c2610.94,1712.78) U3.K9@2610.94,1724.47
  Mid-Layer 1 w5: v1@577.14,2214.64 cw(c577.14,2196.53) 589.94,2209.33 cw(c602.74,2222.14) v1@584.64,2222.14 ; v1(577.14,2222.14) 883.27,1916 2255,1916 2403,1768 2532.89,1768 v1(2591.26,1709.63) ; v1@2583.76,1709.63 ccw(c2565.65,1709.63) 2578.46,1722.43 ccw(c2591.26,1735.24) v1@2591.26,1717.13
KEY1: R44.1 U3.M15 | length 1550.5
  Top Layer w5: v1@2305.7,444.3 ccw(c2292.89,457.11) 2311,457.11 ccw(c2329.11,457.11) v1@2316.3,444.3 ; v1(2311,439) 2311,1186 2513,1388 2513,1473.89 U3.M15@2532.2,1493.09 ; U3.M15@2524.86,1493.09 cw(c2507.14,1493.09) 2519.67,1480.56 cw(c2532.2,1468.03) U3.M15@2532.2,1485.75
  Mid-Layer 1 w5: v1@2305.7,332.3 ccw(c2292.89,345.11) 2311,345.11 ccw(c2329.11,345.11) v1@2316.3,332.3 ; v1@2305.7,433.7 cw(c2292.89,420.89) 2311,420.89 cw(c2329.11,420.89) v1@2316.3,433.7 ; v1(2311,327) v1(2311,439)
  Bottom Layer w6: R44.1@2301.89,305.27 ccw(c2280.54,327) v1(2311,327) ; v1@2305.12,323.2 cw(c2293.15,315.46) 2306.92,311.77 cw(c2320.69,308.08) v1@2314.19,320.77 ; v1@2306.05,322.05 cw(c2294.1,310.1) 2311,310.1 cw(c2327.9,310.1) v1@2315.95,322.05 ; R44.1@2306.09,300.99 ccw(c2294.6,312.69) 2311,312.69 ccw(c2327.4,312.69) R44.1@2315.91,300.99 ; v1@2307.81,320.77 cw(c2301.31,308.08) 2315.08,311.77 cw(c2328.85,315.46) v1@2316.88,323.2 ; R44.1@2311,296 v1(2311,327) ; R44.1@2320.11,305.27 cw(c2341.46,327) v1(2311,327)
KEY2: R40.1 U3.M16 | length 1973.1
  Top Layer w5: v1@2475.7,431.3 ccw(c2462.89,444.11) 2481,444.11 ccw(c2499.11,444.11) v1@2486.3,431.3 ; v1(2481,426) 2481,1324 2532.2,1375.2 U3.M16@2532.2,1453.72 ; U3.M16@2527.01,1448.53 cw(c2514.48,1436) 2532.2,1436 cw(c2549.93,1436) U3.M16@2537.4,1448.53
  Mid-Layer 1 w5: v1@2481,418.5 cw(c2481,400.39) 2493.8,413.2 cw(c2506.61,426) v1@2488.5,426 ; v1(2481,426) 2584,323 v1(3133,323) ; v1@3127.7,317.7 ccw(c3114.89,304.89) 3114.89,323 ccw(c3114.89,341.11) v1@3127.7,328.3
  Bottom Layer w6: R40.1@3124.89,306.16 ccw(c3111.46,323) v1(3133,323) ; v1@3128.05,318.05 cw(c3116.1,306.1) 3133,306.1 cw(c3149.9,306.1) v1@3137.95,318.05 ; v1@3128.43,317.7 cw(c3124.92,313.62) 3130.11,312.23 cw(c3135.31,310.84) v1@3134.31,316.12 ; v1@3131.69,316.12 cw(c3130.69,310.84) 3135.89,312.23 cw(c3141.08,313.62) v1@3137.57,317.7 ; R40.1@3133,296 v1(3133,323) ; R40.1@3141.11,306.16 cw(c3154.54,323) v1(3133,323)
KEY3: R39.1 U3.E16 | length 2100.8
  Top Layer w5: U3.E16@2807.8,1446.38 cw(c2807.8,1428.66) 2820.33,1441.19 cw(c2832.86,1453.72) U3.E16@2815.14,1453.72 ; U3.E16@2807.8,1453.72 v1(2827,1434.52) ; U3.E16@2811.16,1446.48 cw(c2802.67,1431.78) v1@2819.55,1433.68 ; U3.E16@2815.04,1450.36 ccw(c2829.74,1458.85) v1@2827.84,1441.97 ; 2817.64,1442.74 ccw(c2822.53,1451.2) v1@2825.06,1441.76 ; 2818.78,1443.87 cw(c2810.32,1438.99) v1@2819.76,1436.46 ; v1@2819.5,1434.52 ccw(c2801.39,1434.52) 2814.2,1447.32 ccw(c2827,1460.13) v1@2827,1442.02 ; 2819.74,1441.53 cw(c2814.91,1433.16) v1@2824.52,1434.24 ; 2819.99,1441.78 ccw(c2828.36,1446.61) v1@2827.28,1437
  Mid-Layer 1 w5: v1@2827,1427.02 cw(c2827,1408.91) 2839.8,1421.72 cw(c2852.61,1434.52) v1@2834.5,1434.52 ; v1(2827,1434.52) 3232,1029.52 3232,536 3442,326 v1(3805,326) ; v1@3799.7,320.7 ccw(c3786.89,307.89) 3786.89,326 ccw(c3786.89,344.11) v1@3799.7,331.3
  Bottom Layer w6: R39.1@3796.11,305.49 ccw(c3776.89,326) v1(3805,326) ; v1@3799.36,321.85 cw(c3790,314.95) 3801.23,311.94 cw(c3812.47,308.93) v1@3807.81,319.59 ; v1@3800.05,321.05 cw(c3788.1,309.1) 3805,309.1 cw(c3821.9,309.1) v1@3809.95,321.05 ; R39.1@3800.21,301.11 ccw(c3789.86,312.15) 3805,312.15 ccw(c3820.14,312.15) R39.1@3809.79,301.11 ; v1@3802.19,319.59 cw(c3797.53,308.93) 3808.77,311.94 cw(c3820,314.95) v1@3810.64,321.85 ; R39.1@3805,296 v1(3805,326) ; R39.1@3813.89,305.49 cw(c3833.11,326) v1(3805,326)
L1: J5.14 U3.L1 | length 1660.2
  Top Layer w5: U3.L1@2566.38,2049.47 ccw(c2553.85,2062) 2571.57,2062 ccw(c2589.3,2062) U3.L1@2576.77,2049.47 ; U3.L1@2571.57,2044.28 2571.57,2378.57 2771,2578 2771,2914 2703,2982 J5.14@2703,3009.17 ; J5.14@2695.03,3009.17 ccw(c2741.38,3009.17) 2708.6,2976.4 ; J5.14@2700.03,3009.17 ccw(c2758.45,3009.17) 2717.14,2967.86 ; J5.14@2705.03,3009.17 ccw(c2775.52,3009.17) 2725.68,2959.32 ; J5.14@2710.03,3009.17 ccw(c2792.6,3009.17) 2734.21,2950.79 ; J5.14@2715.03,3009.17 ccw(c2809.67,3009.17) 2742.75,2942.25 ; J5.14@2720.03,3009.17 ccw(c2826.74,3009.17) 2751.28,2933.72 ; J5.14@2725.03,3009.17 ccw(c2843.81,3009.17) 2759.82,2925.18 ; J5.14@2730.03,3009.17 ccw(c2860.88,3009.17) 2768.35,2916.65
L2: J5.13 U3.L2 | length 1494.4
  Top Layer w5: U3.L2@2564.23,2004.91 ccw(c2546.51,2004.91) 2559.04,2017.44 ccw(c2571.57,2029.97) U3.L2@2571.57,2012.25 ; U3.L2@2571.57,2004.91 2553,2023.48 2553,2399 2742,2588 2742,2901 2660,2983 2660,3066.17 J5.13@2703,3109.17 ; J5.13@2676.01,3107.79 cw(c2621.19,3104.99) 2660,3066.18 cw(c2698.82,3027.36) J5.13@2701.62,3082.18 ; J5.13@2681,3108.05 cw(c2636.32,3105.76) 2667.96,3074.13 cw(c2699.59,3042.5) J5.13@2701.87,3087.17 ; J5.13@2685.99,3108.3 cw(c2651.46,3106.54) 2675.91,3082.08 cw(c2700.36,3057.63) J5.13@2702.13,3092.17
L9: RN13.8 U3.L9 | length 2381.5
  Top Layer w5: RN13.8@541.15,2151.25 v1(578.75,2151.25) ; RN13.8@556.76,2147.45 cw(c565.93,2138.28) 565.93,2151.25 cw(c565.93,2164.22) RN13.8@556.76,2155.05 ; v1@573.45,2145.95 ccw(c560.64,2133.14) 560.64,2151.25 ccw(c560.64,2169.36) v1@573.45,2156.55
  Top Layer w10: v1(2551.89,1709.63) U3.L9@2571.57,1729.32 ; v1@2551.89,1714.63 ccw(c2551.89,1726.7) 2560.42,1718.16 ccw(c2568.96,1709.63) v1@2556.89,1709.63 ; U3.L9@2566.73,1729.32 cw(c2555.04,1729.32) 2563.31,1721.05 cw(c2571.57,1712.78) U3.L9@2571.57,1724.47
  Mid-Layer 1 w5: 830,1900 2244,1900 2386,1758 2510,1758 2551.89,1716.11 v1(2551.89,1709.63) ; 2534.5,1733.5 cw(c2510.63,1709.63) v1@2544.39,1709.63 ; 2543.04,1724.96 cw(c2527.7,1709.63) v1@2549.39,1709.63
  Mid-Layer 1 w6: v1@578.75,2144.25 cw(c578.75,2127.35) 590.7,2139.3 cw(c602.65,2151.25) v1@585.75,2151.25 ; v1(578.75,2151.25) 830,1900
L10: RN13.7 U3.L10 | length 2386.4
  Top Layer w5: RN13.7@541.15,2119.75 v1(578.75,2119.75) ; RN13.7@556.76,2115.95 cw(c565.93,2106.78) 565.93,2119.75 cw(c565.93,2132.73) RN13.7@556.76,2123.55 ; v1@573.45,2114.45 ccw(c560.65,2101.65) 560.65,2119.75 ccw(c560.65,2137.86) v1@573.45,2125.06
  Top Layer w10: v1(2551.89,1670.26) U3.L10@2571.57,1689.94 ; v1@2551.89,1675.26 ccw(c2551.89,1687.33) 2560.42,1678.79 ccw(c2568.96,1670.26) v1@2556.89,1670.26 ; U3.L10@2566.73,1689.94 cw(c2555.04,1689.94) 2563.31,1681.68 cw(c2571.57,1673.41) U3.L10@2571.57,1685.1
  Mid-Layer 1 w5: v1@578.75,2112.25 cw(c578.75,2094.15) 591.56,2106.95 cw(c604.36,2119.75) v1@586.25,2119.75 ; v1(578.75,2119.75) 817.51,1881 2238,1881 2371,1748 2500,1748 2533,1715 2533,1689.15 v1(2551.89,1670.26) ; v1@2544.39,1670.26 ccw(c2526.28,1670.26) 2539.09,1683.06 ccw(c2551.89,1695.87) v1@2551.89,1677.76
  Bottom Layer w5: v1@578.75,2116.25 v1(578.75,2119.75)
LED0: RN34.4 U3.E10 | length 1595.1
  Top Layer w5: v1@3928.7,1186.7 cw(c3917.07,1175.07) RN34.4@3933.51,1175.07 ; RN34.4@3929.71,1174.61 ccw(c3920.54,1183.78) 3933.51,1183.78 ccw(c3946.49,1183.78) RN34.4@3937.31,1174.61 ; v1@3930.26,1185.5 cw(c3927.85,1181.32) 3932.52,1180.07 cw(c3939.82,1178.11) v1@3936.9,1185.08 ; v1@3931.08,1185.09 cw(c3929.06,1180.3) 3934.09,1181.64 ; RN34.4@3933.51,1159 v1@3933.51,1192 ; RN34.4@3933.51,1172.71 cw(c3953.29,1172.71) v1@3939.3,1186.7
  Top Layer w10: U3.E10@2807.8,1685.1 cw(c2807.8,1673.41) 2816.06,1681.68 cw(c2824.33,1689.94) U3.E10@2812.64,1689.94 ; U3.E10@2807.8,1689.94 v1(2827.48,1670.26) ; v1@2822.48,1670.26 ccw(c2810.41,1670.26) 2818.95,1678.79 ccw(c2827.48,1687.33) v1@2827.48,1675.26
  Mid-Layer 1 w5: v1@2827.47,1672.76 cw(c2827.6,1649.48) 2844.06,1665.94 ; v1@2827.52,1662.76 cw(c2827.78,1615.78) 2861,1649 ; v1@2827.5,1667.76 cw(c2827.69,1632.63) 2852.53,1657.47 ; v1(2827.48,1670.26) 2839.74,1670.26 ; v1@2834.16,1666.84 cw(c2839.74,1663.99) 2839.74,1670.26 ; v1@2834.16,1673.67 ccw(c2839.74,1676.53) 2839.74,1670.26 ; v1@3926.5,1192 ccw(c3908.39,1192) 3921.2,1204.8 ccw(c3934,1217.61) v1@3934,1199.5 ; v1(3934,1192) 3477,1649 2861,1649 ; 2839.74,1670.26 2861,1649
LED1: RN34.3 U3.F9 | length 1617.1
  Top Layer w5: v1@3959.7,1186.7 cw(c3946.87,1173.87) 3965.01,1173.87 cw(c3983.09,1173.91) v1@3970.3,1186.7 ; RN34.3@3961.21,1174.61 ccw(c3952.03,1183.78) 3965.01,1183.78 ccw(c3977.98,1183.78) RN34.3@3968.81,1174.61 ; v1@3962.09,1185.09 cw(c3959.62,1179.19) 3965.8,1180.84 cw(c3969.25,1181.77) 3967.88,1185.07 ccw(c3970.37,1179.22) 3964.23,1180.87 ccw(c3960.8,1181.79) v1@3962.15,1185.06 ; RN34.3@3965.01,1159 v1(3965,1192)
  Top Layer w10: U3.F9@2768.43,1724.47 cw(c2768.43,1712.78) 2776.69,1721.05 cw(c2784.96,1729.32) U3.F9@2773.27,1729.32 ; U3.F9@2768.43,1729.32 v1(2788.11,1709.63) ; v1@2783.11,1709.63 ccw(c2771.04,1709.63) 2779.58,1718.16 ccw(c2788.11,1726.7) v1@2788.11,1714.63
  Mid-Layer 1 w5: v1@2788.11,1702.13 cw(c2788.11,1684.02) 2800.91,1696.83 cw(c2813.72,1709.63) v1@2795.61,1709.63 ; v1(2788.11,1709.63) 2809.74,1688 3469,1688 v1(3965,1192) ; v1@3957.5,1192 ccw(c3939.39,1192) 3952.2,1204.8 ccw(c3965,1217.61) v1@3965,1199.5
LED2: RN34.2 U3.C9 | length 1519.3
  Top Layer w5: v1@3990.7,1185.7 cw(c3976.68,1171.68) RN34.2@3996.5,1171.68 ; RN34.2@3992.7,1174.61 ccw(c3983.53,1183.78) 3996.5,1183.78 ccw(c4009.48,1183.78) RN34.2@4000.3,1174.61 ; v1@3993.6,1183.89 cw(c3991.61,1178) 3997.62,1179.61 cw(c4001.76,1180.72) v1@3999.67,1184.46 ; RN34.2@3996.5,1159 v1@3996.5,1191 ; RN34.2@3996.5,1174.11 cw(c4012.89,1174.11) v1@4001.3,1185.7
  Top Layer w10: U3.C9@2886.54,1724.47 cw(c2886.54,1712.78) 2894.8,1721.05 cw(c2903.07,1729.32) U3.C9@2891.38,1729.32 ; U3.C9@2886.54,1729.32 v1(2906.22,1709.63) ; v1@2901.22,1709.63 ccw(c2889.15,1709.63) 2897.69,1718.16 ccw(c2906.22,1726.7) v1@2906.22,1714.63
  Mid-Layer 1 w5: v1(2906.22,1709.63) 3477.37,1709.63 v1(3996,1191) ; v1@2911.52,1704.33 cw(c2924.33,1691.52) 2924.33,1709.63 cw(c2924.33,1727.74) v1@2911.52,1714.93 ; v1@3988.5,1191 ccw(c3970.39,1191) 3983.2,1203.8 ccw(c3996,1216.61) v1@3996,1198.5
LED3: RN34.1 U3.D9 | length 1602.5
  Top Layer w5: v1@4021.7,1185.7 cw(c4008.89,1172.89) 4027,1172.89 cw(c4045.11,1172.89) v1@4032.3,1185.7 ; RN34.1@4024.2,1174.61 ccw(c4017.44,1181.37) v1@4027,1181.37 ; v1@4024.98,1183.78 cw(c4023.58,1178.73) 4028.64,1180.08 cw(c4032.26,1181.06) v1@4030.51,1184.37 ; RN34.1@4027,1160 v1(4027,1191) ; v1@4027,1186.2 ccw(c4043.39,1186.2) RN34.1@4031.8,1174.61
  Top Layer w10: U3.D9@2847.17,1724.47 cw(c2847.17,1712.78) 2855.43,1721.05 cw(c2863.7,1729.32) U3.D9@2852.01,1729.32 ; U3.D9@2847.17,1729.32 v1(2866.85,1709.63) ; v1@2861.85,1709.63 ccw(c2849.78,1709.63) 2858.32,1718.16 ccw(c2866.85,1726.7) v1@2866.85,1714.63
  Mid-Layer 1 w5: v1(2866.85,1709.63) 2885.22,1728 3490,1728 v1(4027,1191) ; v1@2866.85,1717.13 ccw(c2866.85,1735.24) 2879.65,1722.43 ccw(c2892.46,1709.63) v1@2874.35,1709.63 ; v1@4019.5,1191 ccw(c4001.39,1191) 4014.2,1203.8 ccw(c4027,1216.61) v1@4027,1198.5
LED_A: RN14.2 U13.11 | length 834.8
  Top Layer w12: U13.11@1495,918 cw(c1495,860.06) 1535.97,901.03 cw(c1576.94,942) U13.11@1519,942 ; U13.11@1495,942 1611,826 1803,826 1872.5,895.5 RN14.2@1872.5,1185
LED_B: RN10.4 U13.7 | length 898.4
  Top Layer w12: U13.7@1795,542 1856,542 2105.49,791.49 RN10.4@2105.49,1185 ; U13.7@1811.97,525.03 cw(c1852.94,484.06) 1852.94,542 cw(c1852.94,599.94) U13.7@1811.97,558.97
LED_C: RN10.2 U13.4 | length 1109.6
  Top Layer w12: U13.4@1495,542 1586,633 1840,633 2042.5,835.5 RN10.2@2042.5,1185 ; U13.4@1495,566 ccw(c1495,623.94) 1535.97,582.97 ccw(c1576.94,542) U13.4@1519,542
LED_D: RN14.3 U13.1 | length 1252.6
  Top Layer w12: U13.1@1195,542 1431,778 1815,778 1903.99,866.99 RN14.3@1903.99,1185 ; U13.1@1195,566 ccw(c1195,623.94) 1235.97,582.97 ccw(c1276.94,542) U13.1@1219,542
LED_E: RN10.1 U13.3 | length 1164.9
  Top Layer w12: U13.3@1395,542 1529,676 1829,676 2011,858 RN10.1@2011,1185 ; U13.3@1395,566 ccw(c1395,623.94) 1435.97,582.97 ccw(c1476.94,542) U13.3@1419,542
LED_F: RN14.1 U13.10 | length 643.7
  Top Layer w12: U13.10@1595,918 cw(c1595,860.06) 1635.97,901.03 cw(c1676.94,942) U13.10@1619,942 ; U13.10@1595,942 1657,880 1800,880 1841,921 RN14.1@1841,1185
LED_G: RN10.3 U13.6 | length 956.6
  Top Layer w12: U13.6@1695,542 1749,596 1861,596 2073.99,808.99 RN10.3@2073.99,1185 ; U13.6@1695,566 ccw(c1695,623.94) 1735.97,582.97 ccw(c1776.94,542) U13.6@1719,542
LED_H: RN14.4 U13.2 | length 1202
  Top Layer w12: U13.2@1295,542 1483,730 1829,730 1935.49,836.49 RN14.4@1935.49,1185 ; U13.2@1295,566 ccw(c1295,623.94) 1335.97,582.97 ccw(c1376.94,542) U13.2@1319,542
M1: J5.7 U3.M1 | length 1895
  Top Layer w5: U3.M1@2527.01,2049.47 ccw(c2514.48,2062) 2532.2,2062 ccw(c2549.93,2062) U3.M1@2537.4,2049.47 ; U3.M1@2532.2,2044.28 2532.2,2422 2609,2498.8 2609,2693 2555,2747 2555,3123 2591.17,3159.17 2953,3159.17 J5.7@3003,3109.17 ; J5.7@2975.97,3109.17 ccw(c2910.72,3109.17) 2956.86,3155.31 ccw(c3003,3201.45) J5.7@3003,3136.2 ; J5.7@2980.97,3109.17 ccw(c2927.79,3109.17) 2965.4,3146.78 ccw(c3003,3184.38) J5.7@3003,3131.2 ; J5.7@2985.97,3109.17 ccw(c2944.86,3109.17) 2973.93,3138.24 ccw(c3003,3167.31) J5.7@3003,3126.2
M6: J5.16 U3.M6 | length 2069.5
  Top Layer w5: J5.16@2592,2998.17 J5.16@2603,3009.17
  Top Layer w10: v1@2512.52,1862.11 cw(c2512.52,1850.04) 2521.05,1858.58 cw(c2529.59,1867.11) v1@2517.52,1867.11 ; v1(2512.52,1867.11) U3.M6@2532.2,1847.43 ; U3.M6@2527.36,1847.43 ccw(c2515.67,1847.43) 2523.94,1855.69 ccw(c2532.2,1863.96) U3.M6@2532.2,1852.27
  Mid-Layer 1 w5: 2492.38,1897.62 cw(c2461.88,1867.11) v1@2505.02,1867.11 ; 2500.92,1889.08 cw(c2478.95,1867.11) v1@2510.02,1867.11 ; 2509.45,1880.55 cw(c2496.02,1867.11) v1@2515.02,1867.11 ; v1@2510.17,1874.23 ccw(c2509.1,1877.48) 2512.52,1877.48 ; v1(2512.52,1867.11) 2512.52,1877.48 ; v1@2514.87,1874.23 cw(c2515.94,1877.48) 2512.52,1877.48 ; 2534.82,2909.82 ccw(c2435.46,3009.17) J5.16@2575.97,3009.17 ; 2543.35,2918.35 ccw(c2452.53,3009.17) J5.16@2580.97,3009.17 ; 2551.89,2926.89 ccw(c2469.61,3009.17) J5.16@2585.97,3009.17 ; 2560.42,2935.43 ccw(c2486.68,3009.17) J5.16@2590.97,3009.17 ; 2568.96,2943.96 ccw(c2503.75,3009.17) J5.16@2595.97,3009.17 ; 2577.5,2952.5 ccw(c2520.82,3009.17) J5.16@2600.97,3009.17 ; 2586.03,2961.03 ccw(c2537.89,3009.17) J5.16@2605.97,3009.17 ; 2594.57,2969.57 ccw(c2554.96,3009.17) J5.16@2610.97,3009.17 ; J5.16@2599.17,2982.42 cw(c2598.54,2978) 2603,2978 ; J5.16@2603,3009.17 2603,2978 ; 2603.1,2978.1 ccw(c2572.03,3009.17) J5.16@2615.97,3009.17 ; J5.16@2606.83,2982.42 ccw(c2607.46,2978) 2603,2978 ; 2512.52,1877.48 2492,1898 2492,1952 2477,1967 2461,1967 2448,1980 2448,2823 2603,2978
M7: J5.18 U3.M7 | length 1592.4
  Top Layer w10: v1@2512.52,1822.74 cw(c2512.52,1810.67) 2521.05,1819.21 cw(c2529.59,1827.74) v1@2517.52,1827.74 ; v1(2512.52,1827.74) U3.M7@2532.2,1808.06 ; U3.M7@2527.36,1808.06 ccw(c2515.67,1808.06) 2523.94,1816.32 ccw(c2532.2,1824.59) U3.M7@2532.2,1812.9
  Mid-Layer 1 w5: J5.18@2475.97,3009.17 cw(c2410.72,3009.17) 2456.86,2963.03 cw(c2503,2916.9) J5.18@2503,2982.15 ; J5.18@2480.97,3009.17 cw(c2427.79,3009.17) 2465.4,2971.57 cw(c2503,2933.97) J5.18@2503,2987.15 ; J5.18@2485.97,3009.17 cw(c2444.86,3009.17) 2473.93,2980.11 cw(c2503,2951.04) J5.18@2503,2992.15 ; J5.18@2503,3009.17 2414,2920.17 2414,1938 2426,1926 2442,1926 2453,1915 2453,1899 2466,1886 2480,1886 2494,1872 2494,1851 2512.52,1832.48 v1(2512.52,1827.74)
M9: RN13.6 U3.M9 | length 2299.1
  Top Layer w5: RN13.6@541.15,2088.26 v1(579.26,2088.26) ; RN13.6@556.76,2084.46 cw(c565.93,2075.28) 565.93,2088.26 cw(c565.93,2101.23) RN13.6@556.76,2092.06 ; v1@573.95,2082.95 ccw(c561.15,2070.15) 561.15,2088.26 ccw(c561.15,2106.36) v1@573.95,2093.56
  Top Layer w10: v1(2512.52,1709.63) U3.M9@2532.2,1729.32 ; v1@2512.52,1714.63 ccw(c2512.52,1726.7) 2521.05,1718.16 ccw(c2529.59,1709.63) v1@2517.52,1709.63 ; U3.M9@2527.36,1729.32 cw(c2515.67,1729.32) 2523.94,1721.05 cw(c2532.2,1712.78) U3.M9@2532.2,1724.47
  Mid-Layer 1 w5: v1@579.26,2080.76 cw(c579.26,2062.65) 592.06,2075.45 cw(c604.86,2088.26) v1@586.76,2088.26 ; v1(579.26,2088.26) 767.52,1900 804.52,1863 2229,1863 2354,1738 2484.15,1738 v1(2512.52,1709.63) ; v1@2505.02,1709.63 ccw(c2486.91,1709.63) 2499.72,1722.43 ccw(c2512.52,1735.24) v1@2512.52,1717.13
N2: RN11.6 U3.N2 | length 2262.8
  Top Layer w5: RN11.6@549,2419.01 560.99,2419.01 ; RN11.6@552.96,2413.63 cw(c552.96,2381.27) 575.84,2404.16 ; RN11.6@552.96,2418.63 cw(c552.96,2398.34) 567.31,2412.69 ; RN11.6@557.93,2416.96 cw(c560.99,2415.69) 560.99,2419.01 ; RN11.6@557.93,2421.06 ccw(c560.99,2422.32) 560.99,2419.01 ; U3.N2@2485.49,2004.91 ccw(c2467.77,2004.91) 2480.3,2017.44 ccw(c2492.83,2029.97) U3.N2@2492.83,2012.25 ; U3.N2@2492.83,2004.91 2473,2024.74 2473,2145 2283,2335 645,2335 560.99,2419.01
N5: J5.15 U3.N5 | length 1656.6
  Top Layer w10: v1@2473.15,1901.48 cw(c2473.15,1889.41) 2481.68,1897.95 cw(c2490.22,1906.48) v1@2478.15,1906.48 ; v1(2473.15,1906.48) U3.N5@2492.83,1886.8 ; U3.N5@2487.99,1886.8 ccw(c2476.3,1886.8) 2484.57,1895.06 ccw(c2492.83,1903.33) U3.N5@2492.83,1891.64
  Mid-Layer 1 w5: 2455.13,1931.87 cw(c2429.75,1906.48) v1@2465.65,1906.48 ; 2463.67,1923.33 cw(c2446.82,1906.48) v1@2470.65,1906.48 ; v1(2473.15,1906.48) 2473.15,1913.85 2454,1933 2454,1957 2428,1983 2428,2849.95 2555,2976.95 2555,3061.17 J5.15@2603,3109.17 ; J5.15@2575.97,3109.17 cw(c2510.72,3109.17) 2556.86,3063.03 cw(c2603,3016.9) J5.15@2603,3082.15 ; J5.15@2580.97,3109.17 cw(c2527.79,3109.17) 2565.4,3071.57 cw(c2603,3033.97) J5.15@2603,3087.15 ; J5.15@2585.97,3109.17 cw(c2544.86,3109.17) 2573.93,3080.11 cw(c2603,3051.04) J5.15@2603,3092.15
N6: J5.17 U3.N6 | length 1754.2
  Top Layer w10: v1@2473.15,1862.11 cw(c2473.15,1850.04) 2481.68,1858.58 cw(c2490.22,1867.11) v1@2478.15,1867.11 ; v1(2473.15,1867.11) U3.N6@2492.83,1847.43 ; U3.N6@2487.99,1847.43 ccw(c2476.3,1847.43) 2484.57,1855.69 ccw(c2492.83,1863.96) U3.N6@2492.83,1852.27
  Mid-Layer 1 w5: 2450.93,1878.07 ccw(c2471.46,1898.6) v1@2473.01,1869.61 ; 2458.86,1870.14 ccw(c2472.27,1883.55) v1@2473.28,1864.61 ; v1@2466.23,1864.22 ccw(c2461.89,1862.41) 2461.89,1867.11 ; v1@2466.23,1870 cw(c2461.89,1871.81) 2461.89,1867.11 ; v1@2472.75,1874.6 cw(c2470.65,1913.65) 2443,1886 ; v1(2473.15,1867.11) 2461.89,1867.11 ; J5.17@2475.97,3109.17 cw(c2410.72,3109.17) 2456.86,3063.03 cw(c2503,3016.9) J5.17@2503,3082.15 ; J5.17@2480.97,3109.17 cw(c2427.79,3109.17) 2465.4,3071.57 cw(c2503,3033.97) J5.17@2503,3087.15 ; J5.17@2485.97,3109.17 cw(c2444.86,3109.17) 2473.93,3080.11 cw(c2503,3051.04) J5.17@2503,3092.15 ; J5.17@2503,3109.17 2374,2980.17 2374,1936 2424,1886 2443,1886 ; 2443,1886 2461.89,1867.11
NCE: R12.1 U3.J3 | length 190.7
  Top Layer w10: v1@2630.63,1980.22 cw(c2630.63,1968.15) 2639.16,1976.69 cw(c2647.7,1985.22) v1@2635.63,1985.22 ; v1(2630.63,1985.22) U3.J3@2650.32,1965.54 ; U3.J3@2645.47,1965.54 ccw(c2633.78,1965.54) 2642.05,1973.8 ccw(c2650.32,1982.07) U3.J3@2650.32,1970.38
  Bottom Layer w10: R12.1@2616.31,2010.14 cw(c2598.42,1991.85) v1@2624,1991.85 ; R12.1@2620.05,2006.6 ccw(c2647.17,2013.86) v1@2633.13,1989.55 ; R12.1@2624,2013.3 ccw(c2658.7,2013.3) v1@2634.16,1988.76 ; R12.1@2624,2018 v1@2624,1991.85 ; v1(2630.63,1985.22) v1@2624,1991.85 ; R12.1@2631.69,2010.14 ccw(c2649.58,1991.85) v1@2624,1991.85
NCONFIG: R10.2 U3.H5 | length 194.1
  Top Layer w10: U3.H5@2689.68,1886.8 v1(2709.37,1906.48) ; U3.H5@2689.68,1891.64 ccw(c2689.68,1903.33) 2697.95,1895.06 ccw(c2706.22,1886.8) U3.H5@2694.53,1886.8 ; v1@2704.37,1906.48 cw(c2692.3,1906.48) 2700.84,1897.95 cw(c2709.37,1889.41) v1@2709.37,1901.48
  Bottom Layer w8: v1(2709.37,1906.48) 2729.74,1926.85 2729.74,2016.74 R10.2@2737,2024
NCSO: U3.D2 U8.1 | length 1496.8
  Top Layer w5: U3.D2@2847.17,2004.91 2867,2024.74 2867,2065 2917,2115 3592,2115 3643,2166 3643,2498 3516,2625 U8.1@3495,2625 ; U3.D2@2847.17,2012.25 ccw(c2847.17,2029.97) 2859.7,2017.44 ccw(c2872.23,2004.91) U3.D2@2854.51,2004.91 ; U8.1@3513,2615.5 cw(c3513,2585.32) 3534.34,2606.66 ; U8.1@3513,2620.5 cw(c3513,2602.39) 3525.8,2615.2 ; U8.1@3522.5,2625 ccw(c3538.19,2625) 3527.1,2613.9
NetC1_1: C1.1 C2.1 R2.2 U4.6 | length 555.5
  Top Layer w5: C1.1@567,2883 C1.1@576,2892
  Top Layer w10: R2.2@494,2810 C1.1@565.5,2881.5 ; R2.2@494,2821 ccw(c494,2847.56) 512.78,2828.78 ccw(c531.56,2810) R2.2@505,2810 ; 543.1,2859.1 ccw(c519.2,2883) C1.1@553,2883 ; C2.1@549.22,2932.11 cw(c513.55,2896.43) C1.1@564,2896.43 ; 550.34,2866.34 cw(c564,2852.69) C1.1@564,2872 ; C1.1@556.22,2890.78 ccw(c537.44,2909.56) 564,2909.56 ccw(c590.56,2909.56) 571.78,2890.78 ccw(c590.56,2909.56) 590.56,2883 ccw(c590.56,2856.44) C1.1@571.78,2875.22 ; C2.1@556.3,2939.18 cw(c537.69,2920.58) 564,2920.58 ; C1.1@564,2883 564,2936 C2.1@576,2948 ; 564,2910.92 cw(c593.96,2910.92) C2.1@572.78,2932.11 ; C1.1@567,2883 603,2883 641.57,2844.43 U4.6@641.57,2814
NetC3_1: C3.1 C46.1 L1.2 R75.2 X1.4 | length 133.5
  Top Layer w20: C3.1@3441,2282 3441,2291 3462.67,2312.67 3477.67,2312.67 R75.2@3518,2353 ; C3.1@3443.5,2282 cw(c3471.26,2282) 3451.63,2301.63
NetC41_1: C41.1 J4.13 R30.1 | length 1533.6
  Top Layer w12: R30.1@3315,2843 3430,2958 3430,3130 3591,3291 4076,3291 J4.13@4135,3232 ; R30.1@3315,2853 ccw(c3315,2877.14) 3332.07,2860.07 ccw(c3349.14,2843) R30.1@3325,2843 ; J4.13@4107,3232 ccw(c4039.4,3232) 4087.2,3279.8 ccw(c4135,3327.6) J4.13@4135,3260 ; J4.13@4119,3232 ccw(c4080.37,3232) 4107.69,3259.31 ccw(c4135,3286.63) J4.13@4135,3248
  Bottom Layer w20: J4.13@4118.03,3248.97 ccw(c4077.06,3289.94) 4135,3289.94 ccw(c4192.94,3289.94) J4.13@4151.97,3248.97 ; J4.13@4135,3232 C41.1@4135,3339
NetC42_1: C42.1 J4.14 R31.1 | length 1730.3
  Top Layer w12: R31.1@3244,2843 3387,2986 3387,3148 3579,3340 4117,3340 J4.14@4225,3232 ; R31.1@3244,2853 ccw(c3244,2877.14) 3261.07,2860.07 ccw(c3278.14,2843) R31.1@3254,2843 ; J4.14@4197,3232 ccw(c4129.4,3232) 4177.2,3279.8 ccw(c4225,3327.6) J4.14@4225,3260 ; J4.14@4209,3232 ccw(c4170.37,3232) 4197.69,3259.31 ccw(c4225,3286.63) J4.14@4225,3248
  Bottom Layer w20: J4.14@4208.03,3248.97 ccw(c4167.06,3289.94) 4225,3289.94 ccw(c4282.94,3289.94) J4.14@4241.97,3248.97 ; J4.14@4225,3232 C42.1@4225,3340
NetCB1_2: CB1.2 R33.1 | length 384.4
  Top Layer w10: CB1.2@3404.18,1475.43 ccw(c3439.5,1500.06) 3439.5,1457 ; CB1.2@3405,1476 3424,1457 R33.1@3497,1457 cw(c3497,1540.16) CB1.2@3428.79,1492.59 ; CB1.2@3412.38,1481.15 ccw(c3458.66,1513.43) 3458.66,1457 ; CB1.2@3420.58,1486.87 ccw(c3477.83,1526.79) 3477.83,1457 ; R33.1@3489.22,1449.22 ccw(c3470.44,1430.44) 3470.44,1457 ccw(c3470.44,1483.56) R33.1@3489.22,1464.78
NetD5_2: D5.2 LS1.1 R34.2 | length 842.7
  Top Layer w15: R34.2@3829.99,1481.99 cw(c3815.48,1467.48) 3836,1467.48 cw(c3856.52,1467.48) 3842.01,1481.99 cw(c3856.52,1467.48) 3856.52,1488 cw(c3856.52,1508.52) R34.2@3842.01,1494.01 ; R34.2@3831.31,1480.91 cw(c3820.4,1464.41) 3839.79,1468.36 ; 3836,1414.49 ccw(c3913.49,1414.49) D5.2@3858.7,1359.7 ; 3836,1450.7 ccw(c3949.7,1450.7) D5.2@3869.3,1370.3 ; R34.2@3836,1486.92 ccw(c3985.92,1486.92) D5.2@3879.91,1380.91 ; 3839.99,1467.34 cw(c3860.82,1471.59) R34.2@3843.09,1483.31 ; D5.2@3864,1365 3836,1393 R34.2@3836,1488 LS1.1@4015,1488 ; 3932.3,1488 ccw(c3932.3,1576.7) LS1.1@3995.02,1513.98 ; 3946.78,1488 cw(c3946.78,1419.78) LS1.1@3995.02,1468.02 ; 3968.51,1488 ccw(c3968.51,1540.49) LS1.1@4005.63,1503.37
NetF1_2: F1.2 SW1.2 SW1.5